# Altium PCB Trans.PcbDoc
Units mil, origin at the board's own origin, x right, y up, seen from the top; angles counter-clockwise.
Board outline 1835 x 1390 mil, 2 copper layers (Top Layer, Bottom Layer); 5 components, 32 nets, 38 pads, 4 vias.
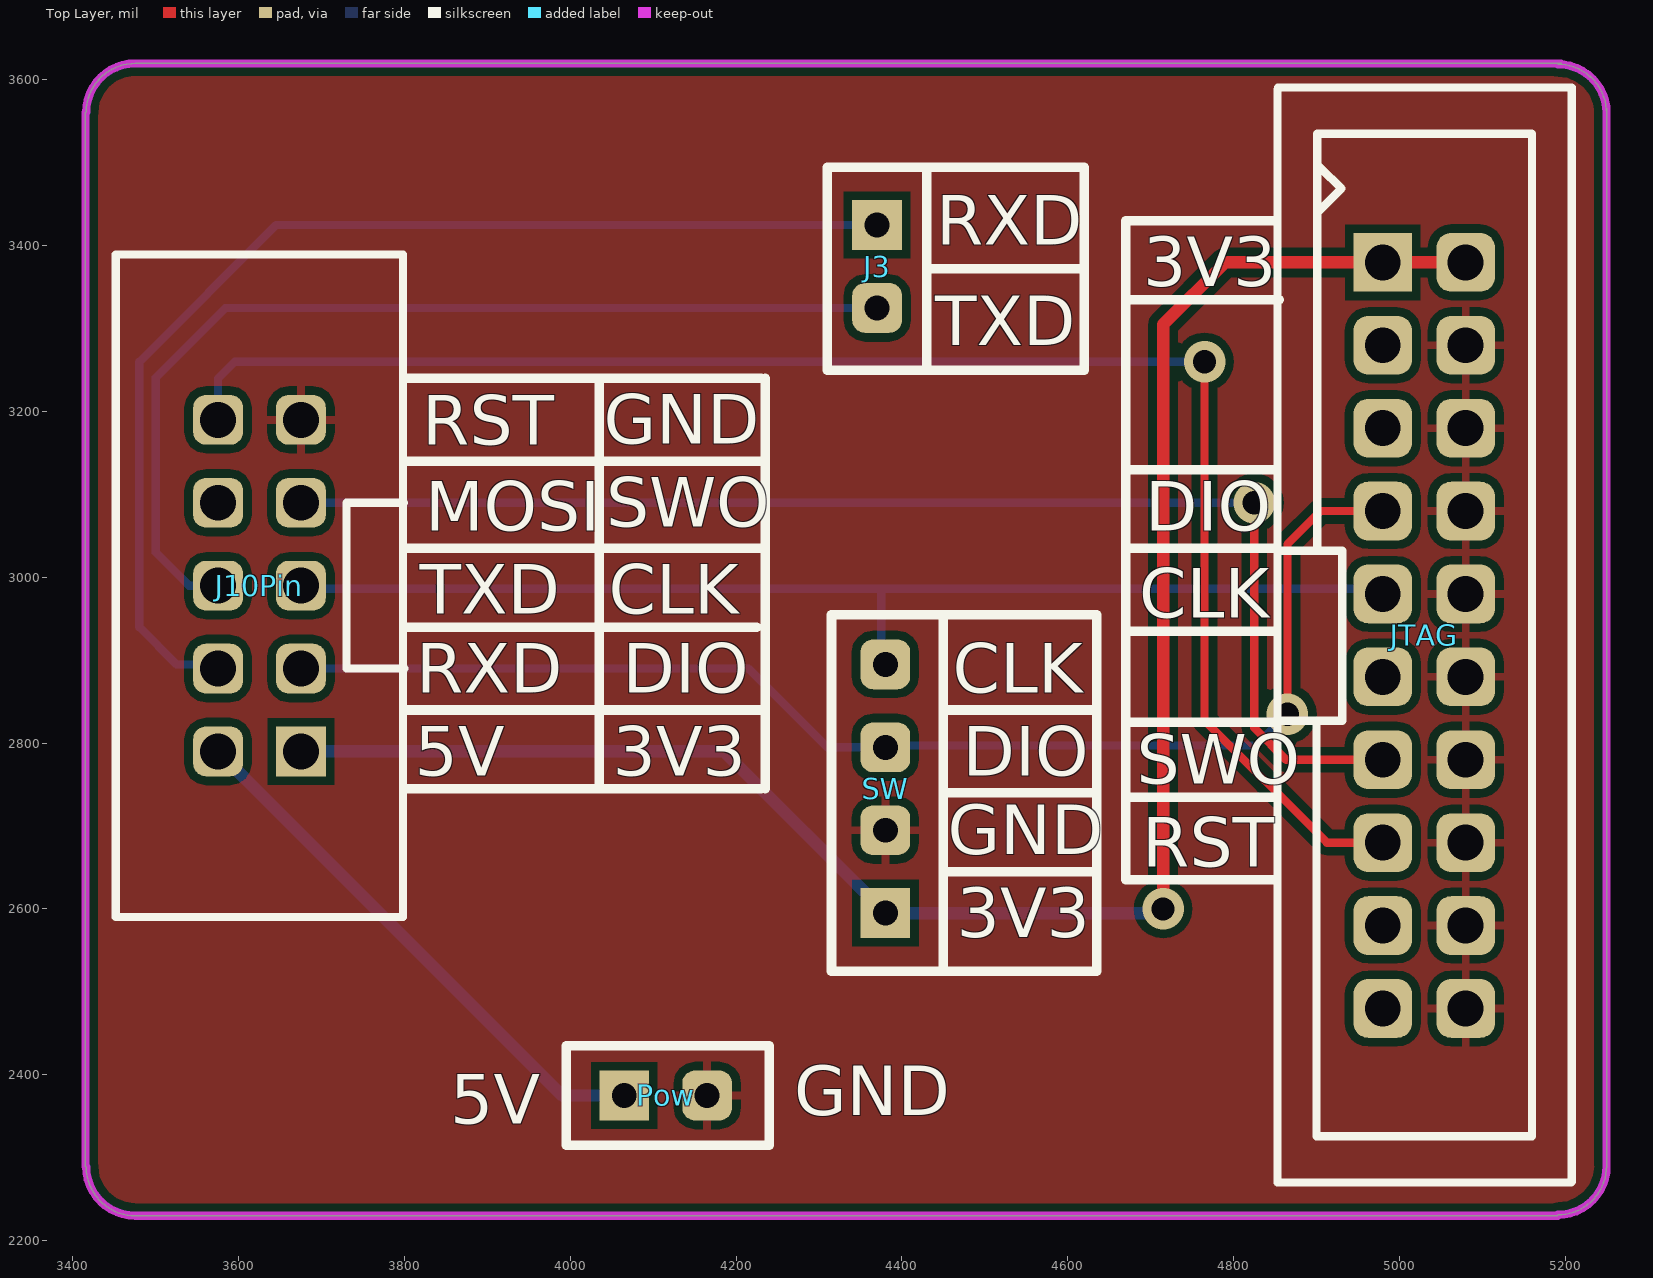
[diagram p0: Top Layer view]
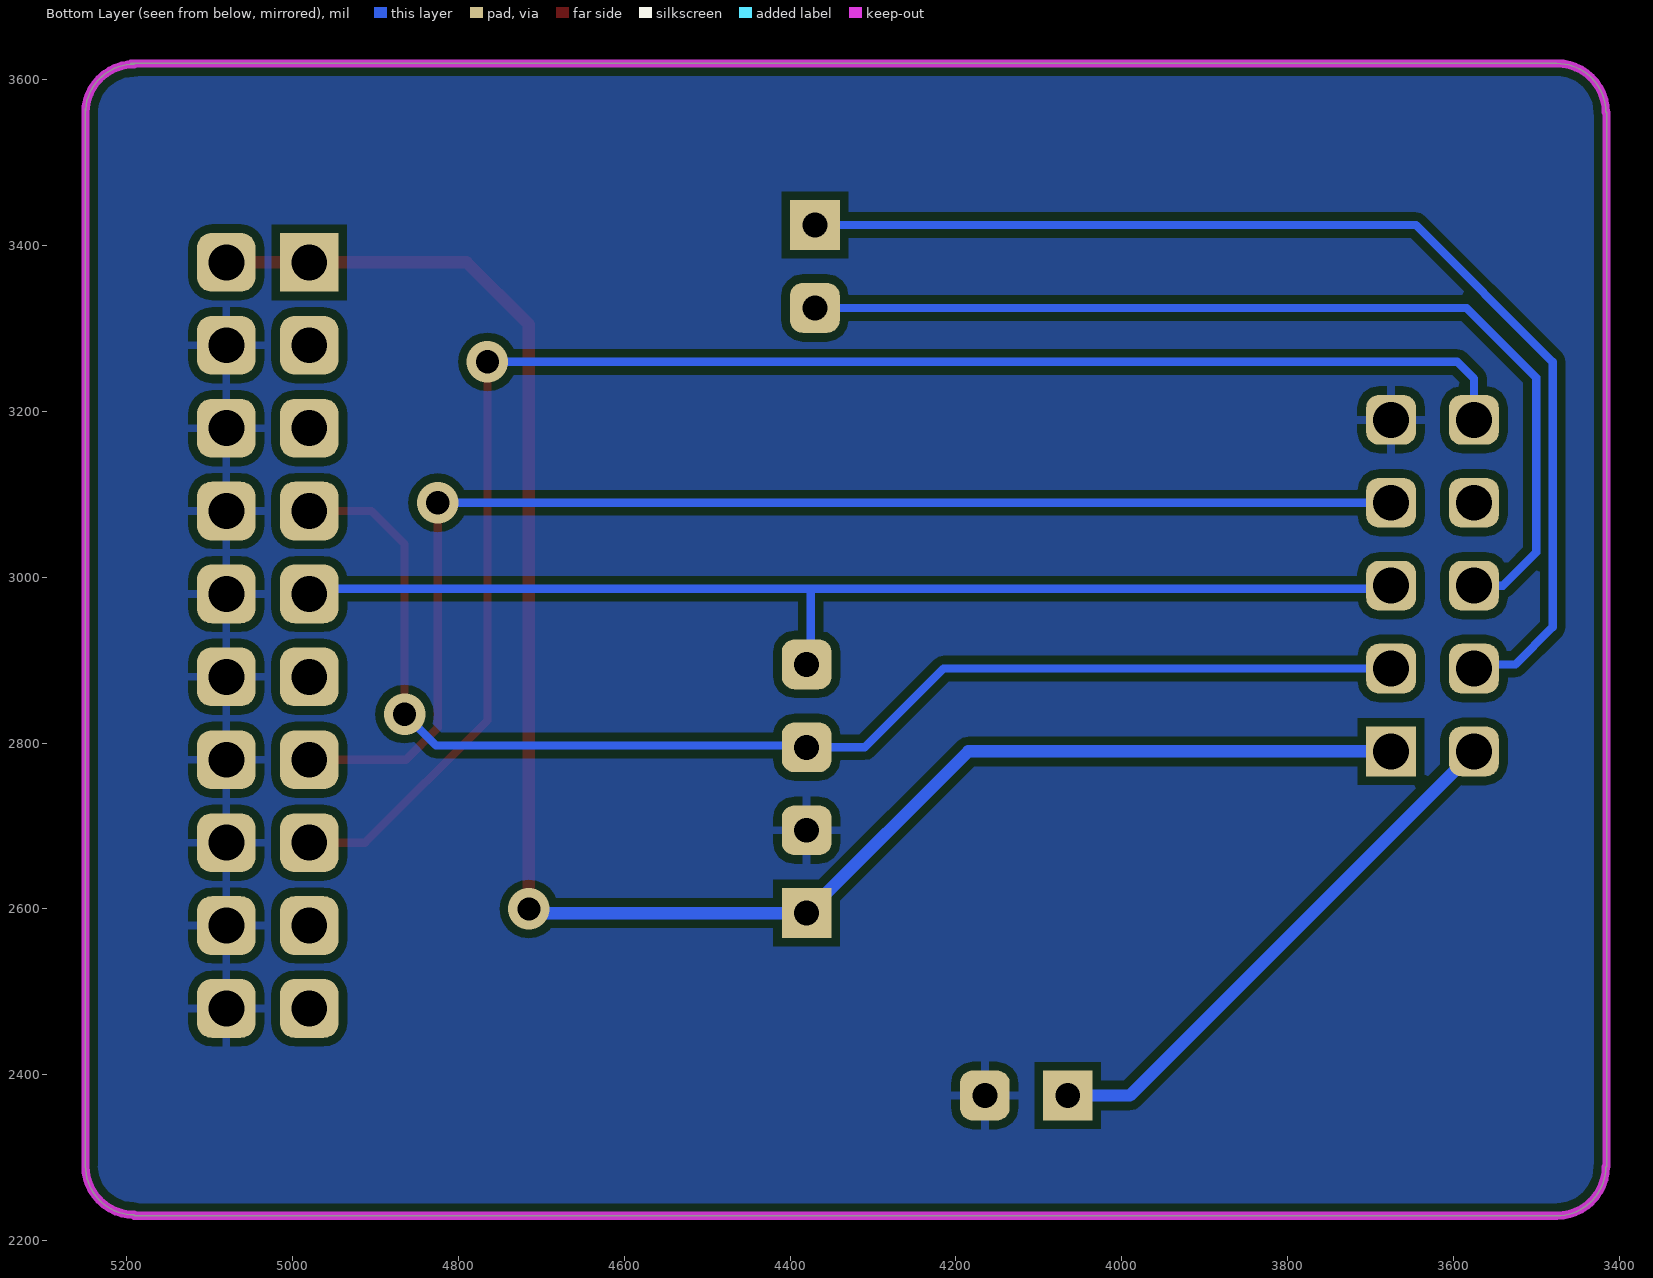
[diagram p1: Bottom Layer view, seen from below]

## Layer stack, top to bottom
Top Solder: solder mask 0.4, Solder Resist, Dk 3.5
Top Layer: signal copper 1.4
Dielectric 1: dielectric 12.6, FR-4, Dk 4.8
Bottom Layer: signal copper 1.4
Bottom Solder: solder mask 0.4, Solder Resist, Dk 3.5

## Board outline
3415,2289.06 3415,3560.94 3415.94,3560.94 cw(c3475,3560.94) 3475,3620 5195,3620 5190.94,3619.06 cw(c5190.94,3560) 5250,3560 5250,3565 5250,2290 cw(c5191.03,2290) 5191.03,2231.03 5191.03,2230 3475,2230 cw(c3475,2289.06)

## Design rules (kind name [scope] priority, off if disabled: settings)
Clearance [All] p1: gap=10 ignorepadtopadclearanceinfootprint=FALSE except(0: Arc-Hole Track-Hole SMDPad-Hole THPad-Hole Via-Hole Fill-Hole Poly-Hole Region-Hole Text-Hole)
PolygonConnect [All] p1: connectstyle=Relief reliefconductorwidth=10 reliefentries=4 polygonreliefangle="90 Angle" airgapwidth=10
RoutingVias [All] p1: holewidth=28 width=50 viastyle="Through Hole" minholewidth=28 minwidth=50 maxholewidth=28 maxwidth=50
SolderMaskExpansion [All] p1: expansion=4 istentingtop=FALSE
Width [All] p1: maxlimit=20 minlimit=10 preferedwidth=10
30 further rules are at their usual default settings.

## Components (designator, comment, footprint, x,y, rotation, side; value= is the part's Value field where it differs from the comment)
J3 "JP2" 2Pin 4370,3425 r180 top
J10Pin "JP10" 10P 3675,2790 r90 top
JTAG "JP20" 20P 5030,2930 r270 top
Pow "Pow5V" 2Pin 4065,2375 r270 top
SW "JP4" 4Pin 4380,2595 r0 top

## Footprints (in the part's own frame and the unit in brackets; to place one, negate y for a bottom-side part, rotate by r counter-clockwise, add the part's x,y. Pads: shape width x height; smd on the part's side, far side on the other; paste and mask are expansions set on the pad)
2Pin [mil]
  rect 60x60 hole 30: 1(0,0)
  rrect50% 60x60 hole 30: 2(0,100)
  silkscreen extent -60,-70 60,175
4Pin [mil]
  rect 60x60 hole 30: 1(0,0)
  rrect50% 60x60 hole 30: 2(0,100) 3(0,200) 4(0,300)
  silkscreen extent -65,-70 70,360
10P [mil]
  rect 60x60 hole 43.3: 1(0,0)
  rrect50% 60x60 hole 43.3: 2(0,100) 3(100,0) 4(100,100) 5(200,0) 6(200,100) 7(300,0) 8(300,100) 9(400,0) 10(400,100)
  silkscreen extent -200,-125 600,223
20P [mm]
  rect 1.8x1.8 hole 1.1: 1(-11.43,-1.27)
  rrect50% 1.8x1.8 hole 1.1: 2(-11.43,1.27) 3(-8.89,-1.27) 4(-8.89,1.27) 5(-6.35,-1.27) 6(-6.35,1.27) 7(-3.81,-1.27) 8(-3.81,1.27) 9(-1.27,-1.27) 10(-1.27,1.27) 11(1.27,-1.27) 12(1.27,1.27) 13(3.81,-1.27) 14(3.81,1.27) 15(6.35,-1.27) 16(6.35,1.27) 17(8.89,-1.27) 18(8.89,1.27) 19(11.43,-1.27) 20(11.43,1.27)
  silkscreen extent -16.79,-4.52 16.76,4.52

## Via types
v1: diameter 50, hole 28, Top Layer to Bottom Layer, 4 vias

## Nets (pads, with @x,y where several pads share a name; then routed paths per layer and width w, separated by ;. In a path a pad name is that pad's centre, name@x,y a point inside that pad or via, vN(x,y) a via of type N, cw(c..) or ccw(c..) an arc to the next point about the centre after c; other vN are vias at no path point)
3.3V: 
3V3: J10Pin.1 JTAG.1 JTAG.2 SW.1 | length 2223.9
  Top Layer w15: v1(4715,2600) 4715,3305 4790,3380 JTAG.1 JTAG.2
  Bottom Layer w15: J10Pin.1 4185,2790 SW.1 4710,2595 v1(4715,2600)
5V: J10Pin.2 Pow.1 | length 661.9
  Bottom Layer w15: J10Pin.2 3990,2375 Pow.1
BOOT0: 
GND: J10Pin.9 JTAG.4 JTAG.6 JTAG.8 JTAG.10 JTAG.12 JTAG.14 JTAG.16 JTAG.18 JTAG.20 Pow.2 SW.2
NetC4_2: 
NetC7_2: 
NetD1_2: 
NetD2_2: 
NetD3_2: 
NetD4_2: 
NetD5_2: 
NetQ1_1: 
NetQ1_2: 
NetR5_1: 
NetR13_2: 
NetR14_2: 
NetR16_1: 
NetR17_1: 
NRST: J10Pin.10 JTAG.15 | length 1956.9
  Top Layer w10: v1(4765,3260) 4765,2827.44 4912.44,2680 JTAG.15
  Bottom Layer w10: J10Pin.10 3575,3240 3595,3260 v1(4765,3260)
OS_IN: 
OS_OUT: 
RXD: J3.1 J10Pin.4 | length 1394.1
  Bottom Layer w10: J10Pin.4 3570,2895 3525,2895 3480,2940 3480,3260 3645,3425 J3.1
STA_LED: 
SWCLK: J10Pin.5 JTAG.9 SW.4 | length 1402.6
  Bottom Layer w10: J10Pin.5 3678.64,2986.36 4375,2986.36 ; SW.4 4375,2900 4375,2986.36 ; JTAG.9 4973.64,2986.36 4375,2986.36
SWDIO: J10Pin.3 JTAG.7 SW.3 | length 1582.5
  Top Layer w10: v1(4865,2835) 4865,3040 4905,3080 JTAG.7
  Bottom Layer w10: J10Pin.3 4215,2890 4310,2795 SW.3 4382.13,2797.13 4827.13,2797.13 v1(4865,2835)
SWO: J10Pin.7 JTAG.13 | length 1592.5
  Top Layer w10: v1(4825,3090) 4825,2818.43 4863.43,2780 JTAG.13
  Bottom Layer w10: J10Pin.7 v1(4825,3090)
SWO0: 
T_JTMS: 
T_SWDIO_IN: 
TXD: J3.2 J10Pin.6 | length 1207.5
  Bottom Layer w10: J10Pin.6 3540,2990 3500,3030 3500,3241.21 3583.79,3325 J3.2
VBUS: 
pads on no net: J10Pin.8 JTAG.3 JTAG.5 JTAG.11 JTAG.17 JTAG.19

## Polygon pours and split planes (outlines as drawn)
GND on Top Layer "GND_L01_P000" (solid, pour order 0): 3415,3620 3415,2230 5250,2230 5245,3620
GND on Bottom Layer "GND_L02_P001" (solid, pour order 1): 3415,3620 5250,3620 5250,2230 3415,2230

## Keep-outs
Keep-Out Layer:
  lines w10: 3415,2289.06 3415,3560.94 ; 3415.94,2289.06 ccw(c3475,2289.06) 3475,2230 5191.03,2230 ; 3415.94,3560.94 cw(c3475,3560.94) 3475,3620 5195,3620 ; 5190.94,3619.06 cw(c5190.94,3560) 5250,3560 ; 5191.03,2231.03 ccw(c5191.03,2290) 5250,2290 5250,3565

## Silkscreen, mask and mechanical layers (free items; w line width, h text height)
Top Overlay:
  lines w11.5: 3800,2745 4230,2745 ; 3800,2840 4230,2840 ; 3800,2940 4225,2940 ; 3800,3035 4230,3035 ; 3800,3140 4230,3140 ; 3800,3240 4230,3240 ; 4035,2745 4035,3240 ; 4235,2745 4235,3240 ; 4430,3250 4620,3250 4620,3495 4430,3495 ; 4430,3372.5 4620,3372.5 ; 4450,2525 4635,2525 4635,2955 4450,2955 ; 4450,2645 4635,2645 ; 4450,2740 4635,2740 ; 4450,2840 4635,2840 ; 4670,2735 4850,2735 ; 4670,2825 4851,2825 ; 4670,2935 4850,2935 ; 4670,3035 4850,3035 ; 4670,3130 4850,3130 ; 4670,3335 4855,3335 ; 4850,2635 4670,2635 4670,3430 4850,3430
  text "RXD" at 4441.59,3401 h60
  text "3V3" at 4691.02,3351 h60
  text "TXD" at 4440.45,3280.01 h60
  text "GND" at 4040.3,3161 h60
  text "RST" at 3821.26,3160.01 h60
  text "SWO" at 4043.02,3061 h60
  text "MOSI" at 3825.16,3056 h60
  text "DIO" at 4693.44,3056 h60
  text "TXD" at 3818.12,2956 h60
  text "CLK" at 4046.45,2956 h60
  text "CLK" at 4686.45,2951 h60
  text "RXD" at 3814.26,2861 h60
  text "DIO" at 4063.44,2861 h60
  text "CLK" at 4461.45,2861 h60
  text "5V" at 3812.55,2761 h60
  text "3V3" at 4051.02,2761 h60
  text "DIO" at 4473.44,2761 h60
  text "SWO" at 4683.02,2751 h60
  text "GND" at 4455.3,2666 h60
  text "RST" at 4689.59,2651 h60
  text "3V3" at 4466.02,2566 h60
  text "GND" at 4270.3,2351 h60
  text "5V" at 3854.87,2341 h60

## Dimensions
3475,2230 to 3475,3620 on Top Overlay
3415,2289.06 to 5250,2290 on Top Overlay